# Altium PCB PCB1.PcbDoc
Units mil, origin at the board's own origin, x right, y up, seen from the top; angles counter-clockwise.
Board outline 6000 x 4000 mil, 2 copper layers (Top Layer, Bottom Layer), stack 61.756 mil thick; 16 components, 7 nets, 56 pads, 0 vias.
Unrouted connection lines stored in the file: 49.
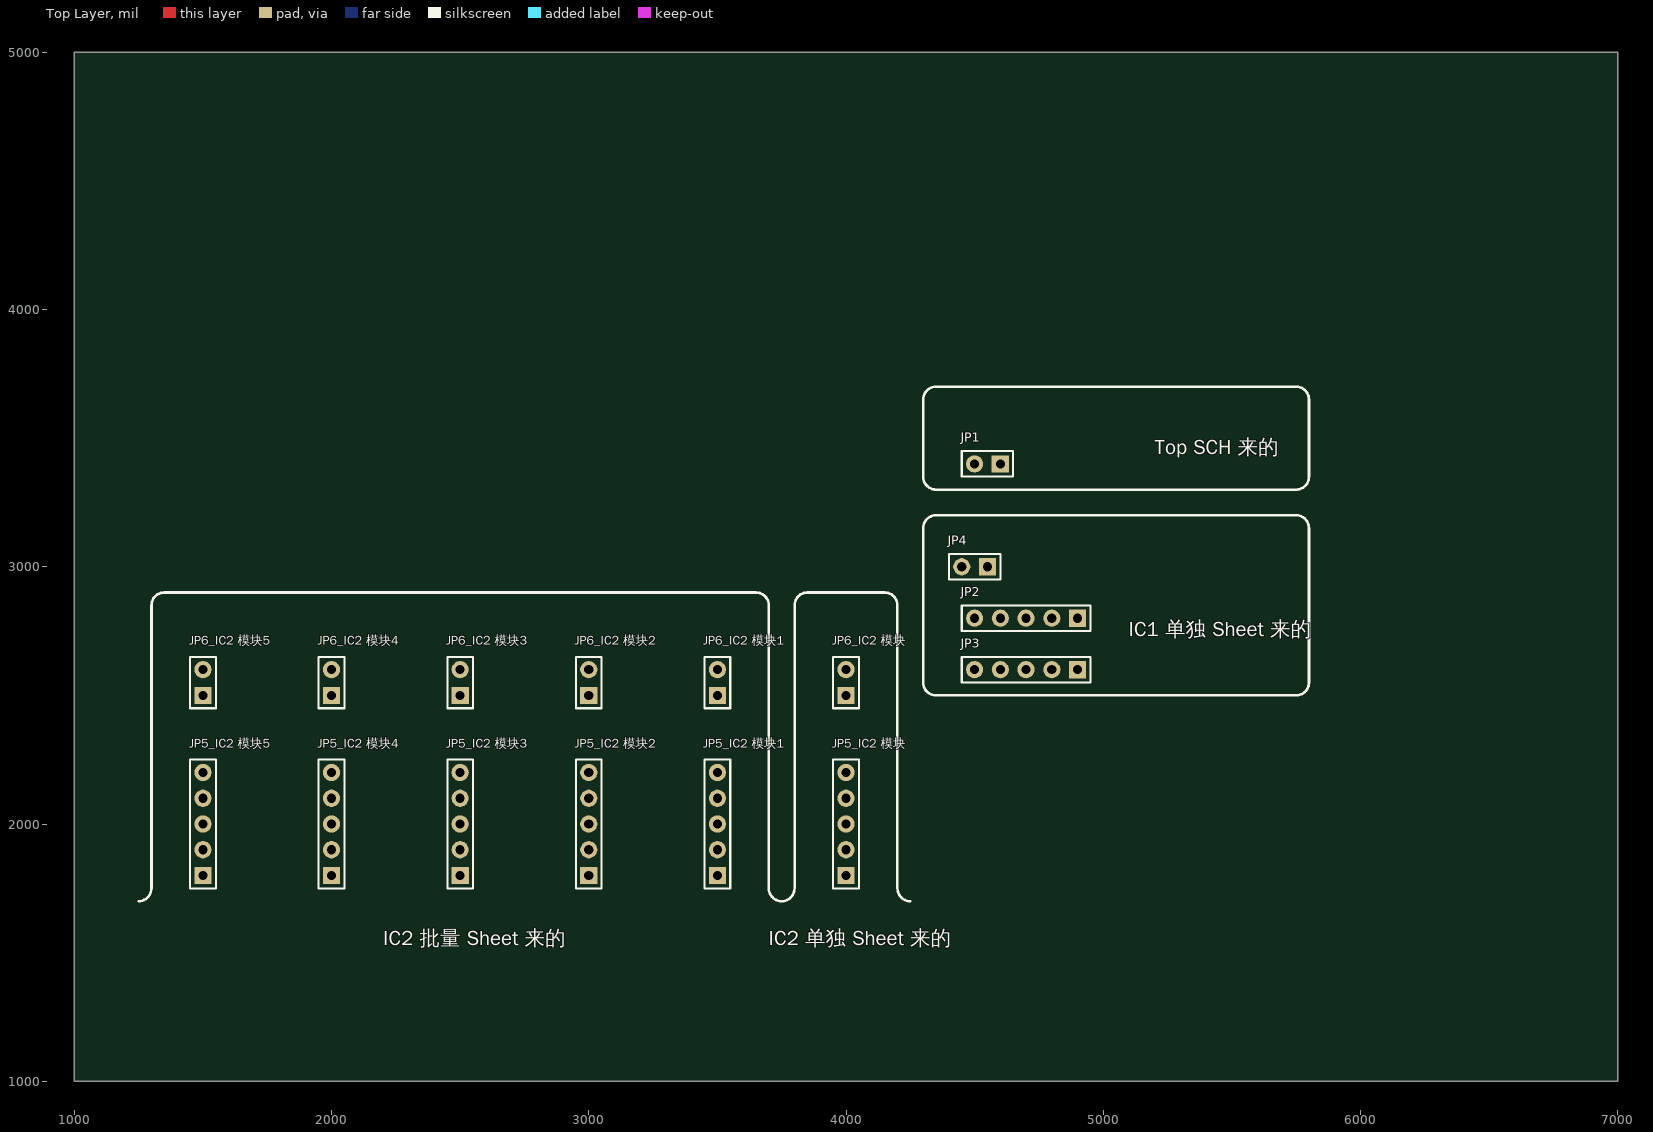
[diagram p0: Top Layer view]
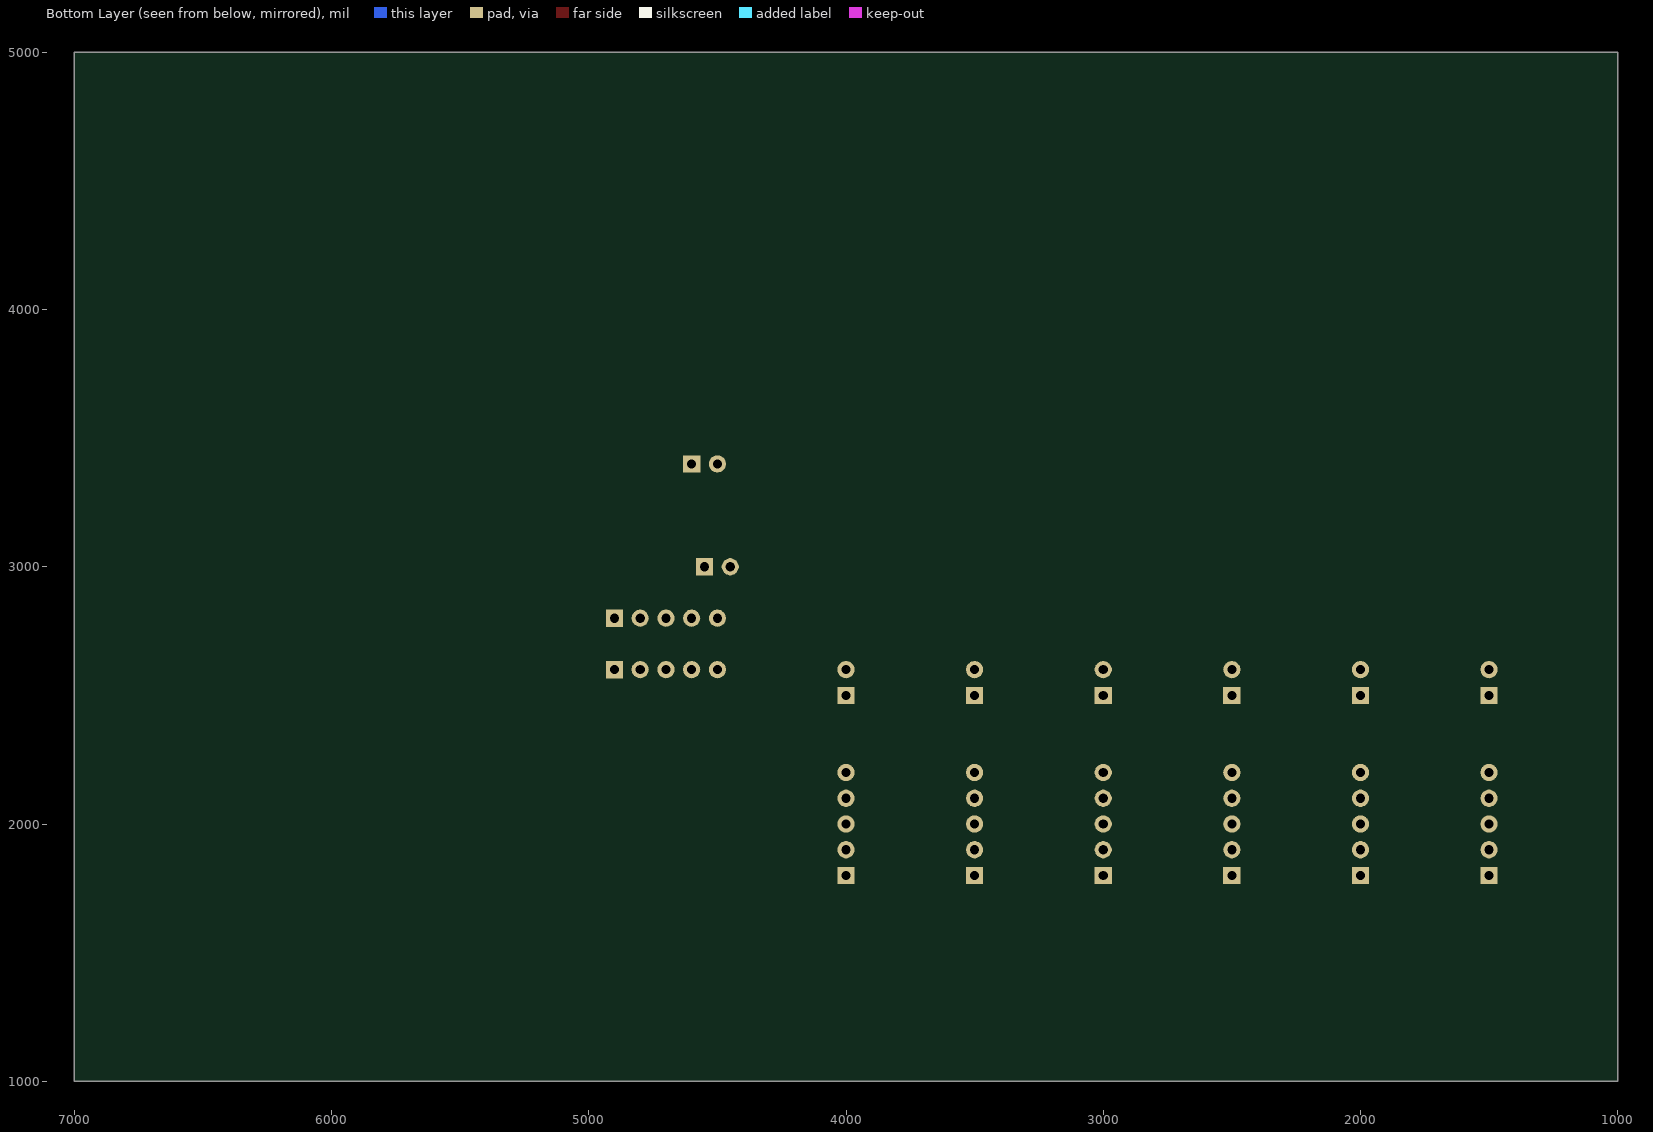
[diagram p1: Bottom Layer view, seen from below]

## Layer stack, top to bottom
Top Solder: solder mask 1, SM-001, Dk 4
Top Layer: signal copper 1.378
Dielectric 1: core 59, Core-043, Dk 4.3
Bottom Layer: signal copper 1.378
Bottom Solder: solder mask 1, SM-001, Dk 4

## Board outline
1000,1000 7000,1000 7000,5000 1000,5000

## Design rules (kind name [scope] priority, off if disabled: settings)
Clearance [All] p1: gap=6 ignorepadtopadclearanceinfootprint=TRUE except(0: Arc-Hole Track-Hole SMDPad-Hole THPad-Hole Via-Hole Fill-Hole Poly-Hole Region-Hole Text-Hole)
ComponentClearance [All] p1 off: gap=0 collisioncheckmode=3 verticalgap=0 showdistances=FALSE
Height [All] p1 off: minheight=0 maxheight=1000 prefheight=500
HoleSize [All] p1: absolutevalues=TRUE maxlimit=100 minlimit=12 maxpercent=80.000 minpercent=20.000
HoleToHoleClearance [All] p1: gap=0 allowstackedmicrovias=TRUE
MinimumSolderMaskSliver [All] p1 off: minsoldermaskwidth=0
MinimumSolderMaskSliver SilkscreenOverComponentPads [All] p2 off: minsoldermaskwidth=0
PlaneClearance [All] p1: clearance=10
PlaneConnect [All] p1: planeconnectstyle=Direct reliefexpansion=20 reliefentries=4 reliefconductorwidth=10 reliefairgap=10
PolygonConnect [All] p1: connectstyle=Direct reliefconductorwidth=10 reliefentries=4 polygonreliefangle="90 Angle" airgapwidth=10
RoutingVias [All] p1: holewidth=20 width=26 viastyle="Through Hole" minholewidth=12 minwidth=18 maxholewidth=100 maxwidth=120
SilkToSilkClearance [All] p1 off: silktosilkclearance=0
SilkToSolderMaskClearance [IsPad] p1 off: minsilkscreentomaskgap=0 clearancetoexposedcopper=TRUE
SolderMaskExpansion [All] p1: expansion=0 istentingtop=FALSE
Width [All] p1: maxlimit=500 minlimit=6 preferedwidth=10
21 further rules are at their usual default settings.

## Classes and differential pairs
component class "IC2 模块5": "JP5_IC2 模块5" "JP6_IC2 模块5"
component class "IC2 模块4": "JP5_IC2 模块4" "JP6_IC2 模块4"
component class "IC2 模块3": "JP5_IC2 模块3" "JP6_IC2 模块3"
component class "IC2 模块2": "JP5_IC2 模块2" "JP6_IC2 模块2"
component class "IC2 模块1": "JP5_IC2 模块1" "JP6_IC2 模块1"
component class Top: JP1
channel class Sheet3: "IC2 模块" U_Sheet31
component class "IC2 模块": "JP5_IC2 模块" "JP6_IC2 模块"
component class "IC1 模块": JP2 JP3 JP4

## Components (designator, comment, footprint, x,y, rotation, side; value= is the part's Value field where it differs from the comment)
JP1 "HDR-1X2" HDR2.54-LI-2P 4550,3400 r180 top
JP2 "HDR-1X5" HDR2.54-LI-5P 4700,2800 r180 top
JP3 "HDR-1X5" HDR2.54-LI-5P 4700,2600 r180 top
JP4 "HDR-1X2" HDR2.54-LI-2P 4500,3000 r180 top
"JP5_IC2 模块" "HDR-1X5" HDR2.54-LI-5P 4000,2000 r90 top (schematic designator JP5)
"JP5_IC2 模块1" "HDR-1X5" HDR2.54-LI-5P 3500,2000 r90 top (schematic designator JP5)
"JP5_IC2 模块2" "HDR-1X5" HDR2.54-LI-5P 3000,2000 r90 top (schematic designator JP5)
"JP5_IC2 模块3" "HDR-1X5" HDR2.54-LI-5P 2500,2000 r90 top (schematic designator JP5)
"JP5_IC2 模块4" "HDR-1X5" HDR2.54-LI-5P 2000,2000 r90 top (schematic designator JP5)
"JP5_IC2 模块5" "HDR-1X5" HDR2.54-LI-5P 1500,2000 r90 top (schematic designator JP5)
"JP6_IC2 模块" "HDR-1X2" HDR2.54-LI-2P 4000,2550 r90 top (schematic designator JP6)
"JP6_IC2 模块1" "HDR-1X2" HDR2.54-LI-2P 3500,2550 r90 top (schematic designator JP6)
"JP6_IC2 模块2" "HDR-1X2" HDR2.54-LI-2P 3000,2550 r90 top (schematic designator JP6)
"JP6_IC2 模块3" "HDR-1X2" HDR2.54-LI-2P 2500,2550 r90 top (schematic designator JP6)
"JP6_IC2 模块4" "HDR-1X2" HDR2.54-LI-2P 2000,2550 r90 top (schematic designator JP6)
"JP6_IC2 模块5" "HDR-1X2" HDR2.54-LI-2P 1500,2550 r90 top (schematic designator JP6)

## Footprints (in the part's own frame and the unit in brackets; to place one, negate y for a bottom-side part, rotate by r counter-clockwise, add the part's x,y. Pads: shape width x height; smd on the part's side, far side on the other; paste and mask are expansions set on the pad)
HDR2.54-LI-2P [mm] "排针，2脚"
  rect 1.7x1.7 hole 0.9: 1(-1.27,0)
  round 1.7 hole 0.9: 2(1.27,0)
  silkscreen extent -2.54,-1.27 2.54,1.27, body extent -2.54,-1.27 2.54,1.27, height 8.5
HDR2.54-LI-5P [mm] "排针，5脚"
  rect 1.7x1.7 hole 0.9: 1(-5.08,0)
  round 1.7 hole 0.9: 2(-2.54,0) 3(0,0) 4(2.54,0) 5(5.08,0)
  silkscreen extent -6.35,-1.27 6.35,1.27, body extent -6.35,-1.27 6.35,1.27, height 8.5

## Part data
JP1 JP4 "JP6_IC2 模块" "JP6_IC2 模块1" "JP6_IC2 模块2" "JP6_IC2 模块3" "JP6_IC2 模块4" "JP6_IC2 模块5": library part "Header 2", "2P接插件", BOM名称=2P接插件, 学习资源=www.ooocke.com, 版权归属=源创客
JP2 JP3 "JP5_IC2 模块" "JP5_IC2 模块1" "JP5_IC2 模块2" "JP5_IC2 模块3" "JP5_IC2 模块4" "JP5_IC2 模块5": library part "Header 5", "5P接插件", BOM名称=5P接插件, 学习资源=www.ooocke.com, 版权归属=源创客

## Nets (pads, with @x,y where several pads share a name; then routed paths per layer and width w, separated by ;. In a path a pad name is that pad's centre, name@x,y a point inside that pad or via, vN(x,y) a via of type N, cw(c..) or ccw(c..) an arc to the next point about the centre after c; other vN are vias at no path point)
bus_net_1: "JP5_IC2 模块1.5" "JP5_IC2 模块2.5" "JP5_IC2 模块3.5" "JP5_IC2 模块4.5" "JP5_IC2 模块5.5" "JP5_IC2 模块.5" JP2.5 JP3.5
bus_net_2: "JP5_IC2 模块1.4" "JP5_IC2 模块2.4" "JP5_IC2 模块3.4" "JP5_IC2 模块4.4" "JP5_IC2 模块5.4" "JP5_IC2 模块.4" JP2.4 JP3.4
bus_net_3: "JP5_IC2 模块1.3" "JP5_IC2 模块2.3" "JP5_IC2 模块3.3" "JP5_IC2 模块4.3" "JP5_IC2 模块5.3" "JP5_IC2 模块.3" JP2.3 JP3.3
bus_net_4: "JP5_IC2 模块1.2" "JP5_IC2 模块2.2" "JP5_IC2 模块3.2" "JP5_IC2 模块4.2" "JP5_IC2 模块5.2" "JP5_IC2 模块.2" JP2.2 JP3.2
bus_net_5: "JP5_IC2 模块1.1" "JP5_IC2 模块2.1" "JP5_IC2 模块3.1" "JP5_IC2 模块4.1" "JP5_IC2 模块5.1" "JP5_IC2 模块.1" JP2.1 JP3.1
IC1_GND: "JP6_IC2 模块1.1" "JP6_IC2 模块2.1" "JP6_IC2 模块3.1" "JP6_IC2 模块4.1" "JP6_IC2 模块5.1" "JP6_IC2 模块.1" JP1.1 JP4.1
IC1_Vcc_3.3V: "JP6_IC2 模块1.2" "JP6_IC2 模块2.2" "JP6_IC2 模块3.2" "JP6_IC2 模块4.2" "JP6_IC2 模块5.2" "JP6_IC2 模块.2" JP1.2 JP4.2

## Silkscreen, mask and mechanical layers (free items; w line width, h text height)
Top Overlay:
  lines w10: 1250,1700 ccw(c1250,1750) 1300,1750 1300,2850 cw(c1350,2850) 1350,2900 3650,2900 cw(c3650,2850) 3700,2850 3700,1750 ccw(c3750,1750) 3750,1700 ccw(c3750,1750) 3800,1750 3800,2800 3800,2850 cw(c3850,2850) 3850,2900 4150,2900 cw(c4150,2850) 4200,2850 4200,1750 ccw(c4250,1750) 4250,1700 ; 4300,2550 ccw(c4350,2550) 4350,2500 5750,2500 ccw(c5750,2550) 5800,2550 5800,3150 ccw(c5750,3150) 5750,3200 4350,3200 ccw(c4350,3150) 4300,3150 4300,3100 4300,2550 ; 4300,3350 ccw(c4350,3350) 4350,3300 5750,3300 ccw(c5750,3350) 5800,3350 5800,3650 ccw(c5750,3650) 5750,3700 4350,3700 ccw(c4350,3650) 4300,3650 4300,3350
  text "Top SCH 来的" at 5200,3418.78 h100
  text "IC1 单独 Sheet 来的" at 5100.09,2710.08 h100
  text "IC2 批量 Sheet 来的" at 2200.09,1509.9 h100
  text "IC2 单独 Sheet 来的" at 3700.09,1510.08 h100